# Altium PCB 175-00029 rev4, 486 CCD Interface.PcbDoc (part 2 of 2)
Units mil, origin at the board's own origin, x right, y up, seen from the top; angles counter-clockwise.
Board outline 2440.95 x 2610.24 mil, 4 copper layers (Top Layer (*.GTL), Internal Plane 1 (*.GP1), Mid-Layer 1  (*.G1), Bottom Layer (*.GBL)), stack 62.6 mil thick; 56 components, 48 nets, 263 pads, 206 vias.
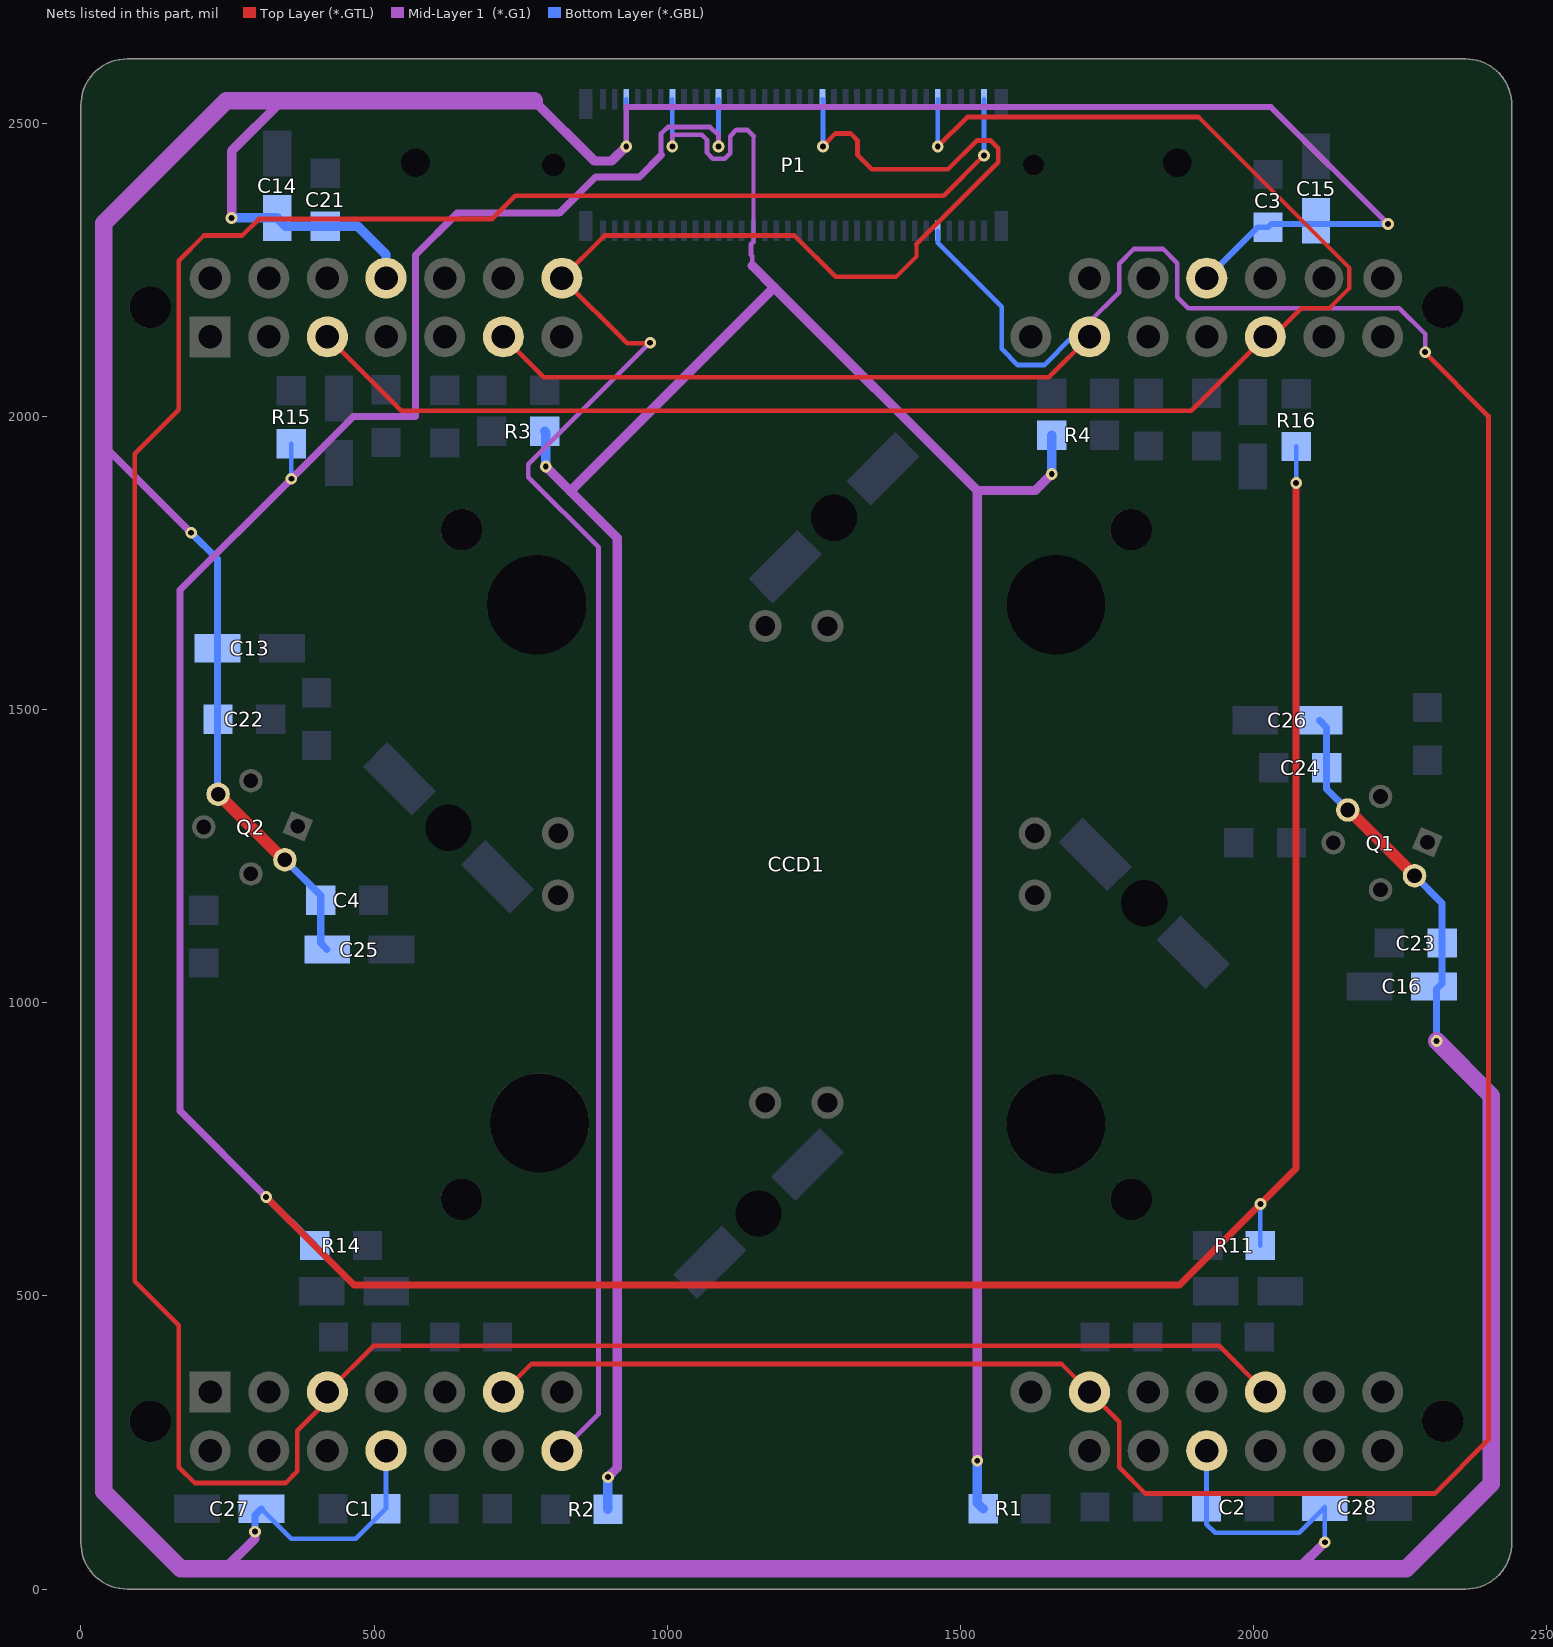
[diagram p4: the nets of this part, all layers, seen from the top]

## Via types
v1: diameter 20, hole 10, Top Layer (*.GTL) to Bottom Layer (*.GBL), 205 vias
v2: diameter 18, hole 8, Top Layer (*.GTL) to Bottom Layer (*.GBL), 1 vias

## Nets (pads, with @x,y where several pads share a name; then routed paths per layer and width w, separated by ;. In a path a pad name is that pad's centre, name@x,y a point inside that pad or via, vN(x,y) a via of type N, cw(c..) or ccw(c..) an arc to the next point about the centre after c; other vN are vias at no path point) (continued)
S3: CCD1.A7 CCD1.D7 P1.29 | length 3622.8
  Top Layer (*.GTL) w7: 1390.43,2238.48 1425.15,2273.21 1425.15,2294.15
  Top Layer (*.GTL) w8: v1@971,2125 931.71,2125 CCD1.D7@820.49,2236.22 893.27,2309 1217,2309 1287.52,2238.48 1390.43,2238.48 ; v1(1266,2461) 1266,2462.16 1286.84,2483 1313,2483 1324.58,2471.42 1324.58,2446.42 1349,2422 1479.09,2422 1528.09,2471 1552,2471 1565,2458 1565,2434 1425.15,2294.15
  Mid-Layer 1  (*.G1) w8: CCD1.A7@820.49,236.22 883,298.73 883,1777 763,1897 763,1918.43 v1@969.57,2125
  Bottom Layer (*.GBL) w8: P1.29@1264.84,2541.34 1266,2540.18 v1(1266,2461)
  other v1: 971,2126
SG: CCD1.B6 CCD1.B16 CCD1.C6 CCD1.C16 P1.10 | length 6063.7
  Top Layer (*.GTL) w8: CCD1.B6@720.49,336.22 768.27,384 1672.71,384 CCD1.B16@1720.49,336.22 1771,285.71 1771,208 1816,163 2309.37,163 2401,254.63 2401,2001 2293,2109 v1(2293,2110) ; CCD1.C6@720.49,2136.22 789.71,2067 1651.27,2067 CCD1.C16@1720.49,2136.22
  Mid-Layer 1  (*.G1) w8: CCD1.C16@1720.49,2136.22 1720.49,2161.49 1771,2212 1771,2261 1796,2286 1846,2286 1870.08,2261.92 1870.08,2203.92 1889,2185 2249,2185 2293,2141 v1(2293,2110)
  Bottom Layer (*.GBL) w8: P1.10@1461.69,2316.93 1461.69,2296.31 1570.55,2187.45 1570.55,2115.45 1598,2088 1643,2088 1691.22,2136.22 CCD1.C16@1720.49,2136.22
TGA: CCD1.B3 CCD1.B19 P1.1 | length 5707.1
  Top Layer (*.GTL) w8: v1(1540.43,2445.43) 1472,2377 741,2377 701,2337 303.02,2337 275.02,2309 210,2309 167,2266 167,2011.92 92,1936.92 92,525 167,450 167,208 194,181 349.09,181 369,200.92 369,270 420.49,321.49 CCD1.B3@420.49,336.22 499.27,415 1941.71,415 CCD1.B19@2020.49,336.22
  Bottom Layer (*.GBL) w8: v1(1540.43,2445.43) P1.1@1540.43,2541.34
TGB: CCD1.C3 CCD1.C19 P1.9 | length 2826.5
  Top Layer (*.GTL) w7: 1906.52,2511 2163.49,2254.03 2163.49,2218.41 2130.08,2185
  Top Layer (*.GTL) w8: CCD1.C3@420.49,2136.22 546.71,2010 1894.27,2010 CCD1.C19@2020.49,2136.22 2033.02,2136.22 2081.8,2185 2130.08,2185 ; v1(1461.69,2461) 1511.69,2511 1906.52,2511
  Bottom Layer (*.GBL) w8: v1(1461.69,2461) P1.9@1461.69,2541.34
VOD: C1.2 C2.2 C3.2 C4.2 C13.1 C14.1 C15.1 C16.1 C21.2 C22.2 C23.2 C24.2 C25.1 C26.1 C27.1 C28.1 CCD1.A4 CCD1.A18 CCD1.D4 CCD1.D18 P1.63 Q1.2 Q1.6 Q2.2 Q2.6 | length 11520.7
  Top Layer (*.GTL) w20: Q2.6@234,1356 Q2.2@346,1244 ; Q1.6@2163,1329 Q1.2@2275,1217
  Mid-Layer 1  (*.G1) w10: v1(930.2,2461) 930.2,2528 2030,2528 v1(2229.5,2328.5)
  Mid-Layer 1  (*.G1) w12: 39,1951 v1(188,1802)
  Mid-Layer 1  (*.G1) w16: 246,35 297,86 v1(297,98) ; v1(257,2339) 257,2453 343,2539 ; 773,2539 876,2436 905.2,2436 v1(930.2,2461) ; 2077,35 v1(2122,80)
  Mid-Layer 1  (*.G1) w30: 773,2539 343,2539 248,2539 39,2330 39,1951 39,166 170,35 246,35 2077,35 2261,35 2406,180 2406,841.63 v1(2312.63,935)
  Bottom Layer (*.GBL) w8: C27.1@308,137 359,86 469,86 C1.2@520,137 ; C1.2@520.49,137.49 CCD1.A4@520.49,236.22 ; v1(930.2,2461) P1.63@930.2,2541.34 ; CCD1.A18@1920,235.73 C2.2@1920,140 1920,111 1935,96 2078,96 C28.1@2122,140 v1(2122,80)
  Bottom Layer (*.GBL) w10: CCD1.D18@1920.49,2236.22 2007.27,2323 C3.2@2025,2323 2030.5,2328.5 v1(2229.5,2328.5)
  Bottom Layer (*.GBL) w12: v1(188,1802) 233,1757 C13.1@233,1605 233,1357 Q2.6@234,1356 ; v1(297,98) 297,126 C27.1@308,137 ; Q2.2@348,1244 409.15,1182.85 C4.2@409.15,1175 409.15,1101.85 C25.1@420,1091 ; C26.1@2113,1482 2125,1470 C24.2@2125,1401 2125,1365 Q1.6@2161,1329 ; Q1.2@2275,1217 2322,1170 C23.2@2322,1102 2322,1032.75 2312.63,1023.37 v1(2312.63,935)
  Bottom Layer (*.GBL) w16: v1(257,2339) C14.1@335,2339 349,2325 C21.2@417,2325 472,2325 520.49,2276.51 CCD1.D4@520.49,2236.22
VOG: P1.55 R1.2 R2.2 R3.2 R4.2 | length 5411
  Mid-Layer 1  (*.G1) w7: 1147.42,2298.12 1147.42,2478.58
  Mid-Layer 1  (*.G1) w8: v1(1008.94,2461) 1008.94,2480.94 1059.06,2480.94 1068,2472 1068,2450 1078,2440 1098.5,2440 1107.5,2449 1107.5,2478.5 1118,2489 1137,2489 1147.42,2478.58 ; 1145.42,2257.58 1145.42,2273.88 1143,2276.3 1143,2293.7 1147.42,2298.12
  Mid-Layer 1  (*.G1) w16: v1(793,1915) 915,1793 915,207 v1(899,191) ; 835,1873 1182.5,2220.5 ; 1145.42,2257.58 1182.5,2220.5 ; v1(1529,219) 1529,1874 ; v1(1656,1902) 1628,1874 1529,1874 ; 1182.5,2220.5 1529,1874
  Bottom Layer (*.GBL) w8: v1(1008.94,2461) P1.55@1008.94,2541.34
  Bottom Layer (*.GBL) w16: R3.2@791,1975 793,1973 v1(793,1915) ; R2.2@899,136 v1@899,191 ; v1(1529,219) 1529,147 R1.2@1539,137 ; v1(1656,1902) R4.2@1656,1968
VRD: P1.47 R11.1 R14.1 R15.1 R16.1 | length 6011
  Top Layer (*.GTL) w12: v1(316,669) 466,519 1874.29,519 v1(2012,656.71) 2073.02,717.73 v1(2073.02,1886.98)
  Mid-Layer 1  (*.G1) w8: 989.5,2446 989.5,2483 ; 990,2483 1001,2494 1073.55,2494 1087.68,2479.87 v1(1087.68,2461)
  Mid-Layer 1  (*.G1) w12: v1(316,669) 169,816 169,1704 v1(359,1894) 465,2000 570.87,2000 570.87,2275.87 642,2347 816.03,2347 878.03,2409 953,2409 990,2446
  Bottom Layer (*.GBL) w8: v1(359,1894) R15.1@359,1954 ; v1(1087.68,2461) P1.47@1087.68,2541.34 ; R11.1@2012,586 v1(2012,656.71) ; v1(2073.02,1886.98) R16.1@2073.02,1949
  Bottom Layer (*.GBL) w12: v1(316,669) R14.1@399,586
pads on no net: P1.0 P1.4 P1.8 P1.32 P1.37 RTD1.0 RTD2.0 RTD3.0 RTD4.0

## Polygon pours and split planes (outlines as drawn)
AGND on Bottom Layer (*.GBL) "BottomGroundPour" (solid, remove dead copper, shelved, pour order 6): 80,2590 2360,2590 2375,2589 2385,2586 2394,2581 2397,2579 2403,2574 2409,2567 2418,2550 2421,2534 2421,67 2419,67 2415,53 2407,41 2393,28.79 2380.94,23 2365,20 80,20 67,21 60,23 49,28 42,33 33,42 24,57 20,74 20,2531 22,2547 28,2561 32,2567 36.58,2572.41 44,2579 56,2586 66,2589 74,2590
AGND on Mid-Layer 1  (*.G1) "Mid1GroundPour" (solid, remove dead copper, shelved, pour order 5): 80,2590 2360,2590 2375,2589 2385,2586 2394,2581 2397,2579 2403,2574 2409,2567 2418,2550 2421,2534 2421,67 2419,67 2415,53 2407,41 2393,28.79 2380.94,23 2365,20 80,20 67,21 60,23 49,28 42,33 33,42 24,57 20,74 20,2531 22,2547 28,2561 32,2567 36.58,2572.41 44,2579 56,2586 66,2589 74,2590
AGND on Top Layer (*.GTL) "TopGroundPour" (solid, remove dead copper, shelved, pour order 4): 80,2590 2360,2590 2375,2589 2385,2586 2394,2581 2397,2579 2403,2574 2409,2567 2418,2550 2421,2534 2421,67 2419,67 2415,53 2407,41 2393,28.79 2380.94,23 2365,20 80,20 67,21 60,23 49,28 42,33 33,42 24,57 20,74 20,2531 22,2547 28,2561 32,2567 36.58,2572.41 44,2579 56,2586 66,2589 74,2590
AGND on Internal Plane 1 (*.GP1) (split plane): 2361.46,2590.14 2373.94,2589.22 2384.75,2585.94 2394.94,2580.49 2403.87,2573.16 2411.2,2564.23 2416.65,2554.05 2420,2542.99 2421.23,2530.51 2420.85,79.48 2419.93,67.01 2416.65,56.19 2411.2,46 2403.87,37.07 2394.94,29.74 2384.76,24.3 2373.7,20.95 2361.22,19.72 79.48,20.1 67.01,21.02 56.19,24.3 46,29.74 37.07,37.07 29.74,46 24.3,56.19 20.94,67.24 19.72,79.73 20.1,2530.75 21.02,2543.23 24.3,2554.05 29.74,2564.23 37.07,2573.16 46,2580.49 56.19,2585.94 67.24,2589.29 79.73,2590.52

## Other copper
Top Layer (*.GTL):
  pour cut-out: 1820.49,336.22 2120.49,336.22 2120.49,236.22 1820.49,236.22 1820,235.73
  pour cut-out: 420.49,236.22 420.49,402.49 448,430 695,430 695,391 672,368 672,236
  pour cut-out: 420.49,2136.22 561,1995.71 561,1990 466.71,1990 320.49,2136.22
  pour cut-out: 2020.49,2136.22 1894.27,2010 1895,2009.27 1895,1971 2026,1971 2027,1970 2170,2113 2170,2136
  pour cut-out: 1724,2239.73 1724,2114 1658,2048 1804,2048 1869,2113 1820.49,2161.51 1820.49,2236.22
  pour cut-out: 1583,2303.06 1583,2270 1669,2184 1671,2184 1671,2186.73 1724,2239.73 1724,2303.06
  pour cut-out: 1382.95,2260 1383,2260.05 1383,2377 1472,2377 1488,2361 1488,2360
  pour cut-out: 1382.95,2529 1382.95,2461 1462,2461 1530,2529
  pour cut-out: 889,2325 771,2325 736,2290 483,2290 469.71,2276.71 469.71,2116.29 558,2028 937,2028 937,2119.71 820.49,2236.22 896.11,2311.84 889,2318.95
  text "*.GTL - TOP LAYER GERBER DATA" at 367,-1421 h80
Mid-Layer 1  (*.G1):
  text "*.G1 - MID LAYER 1 GERBER DATA" at 345,-1699 h80
Bottom Layer (*.GBL):
  pour cut-out: 838.73,2560.01 838.73,2309.86 838.73,2299 849.6,2299 1591.77,2299 1591.77,2558.99
  pour cut-out: 886,2523 886,2472 1546,2472 1546,2523
  pour cut-out: 886,2386 886,2335 1545,2335 1545,2386
  text "175-00029r4" at 1448,317 h35
  text "(C) 2015" at 1447,266 h35
  text "LCOGTN" at 1447,216 h35
  text "*.GBL - BOTTOM LAYER GERBER DATA" at 337,-1873 h80
Internal Plane 1 (*.GP1) (plane layer: these items are gaps in the copper):
  text "*.GP2 - INTERNAL PLANE LAYER 2 GERBER DATA" at 354,-1556 h80

## Silkscreen, mask and mechanical layers (free items; w line width, h text height)
Bottom Overlay:
  lines w1: 886,2335 1545,2335 1545,2386 886,2386 886,2335 ; 886,2472 886,2523 1546,2523 1546,2472 886,2472
Bottom Paste:
  text "*.GBP - BOTTOM-SIDE SOLDER PASTE MASK" at 442.91,-1495.02 h80
Mechanical 1:
  lines w30: 1062.01,1466.54 cw(c1106.3,1466.54) 1106.3,1510.83 1333.66,1510.83 cw(c1333.66,1466.54) 1377.95,1466.54 1377.95,1003.94 cw(c1333.66,1003.94) 1333.66,959.65 1107.28,959.65 ; 1062.99,1466.54 1062.99,1004.92 ccw(c1107.28,1004.92) 1107.28,960.63 ; 0,78.74 ccw(c78.74,78.74) 78.74,0 2362.2,0 ccw(c2362.2,78.74) 2440.95,78.74 2440.94,2531.5 ccw(c2362.2,2531.5) 2362.2,2610.24 78.74,2610.24 ccw(c78.74,2531.5) 0,2531.5 0,78.74
Mechanical 2:
  lines w10: -12869.13,-9564.51 8130.87,-9564.51 8130.87,6435.49 -12869.13,6435.49 -12869.13,-9564.51 ; 4075.87,-9458.51 ccw(c4125.87,-9458.51) 4125.87,-9508.51 4455.87,-9508.51 ccw(c4455.87,-9468.51) 4495.87,-9468.51 4495.87,-9298.51 ccw(c4455.87,-9298.51) 4455.87,-9258.51 4075.87,-9258.51 4075.87,-9458.51 ; 4075.87,-9168.51 ccw(c4125.87,-9168.51) 4125.87,-9218.51 8025.87,-9218.51 ccw(c8025.87,-9168.51) 8075.87,-9168.51 8075.87,-8978.51 ccw(c8025.87,-8978.51) 8025.87,-8928.51 4075.87,-8928.51 4075.87,-9168.51 ; 4075.87,-8838.51 ccw(c4125.87,-8838.51) 4125.87,-8888.51 6005.87,-8888.51 ccw(c6005.87,-8838.51) 6055.87,-8838.51 6055.87,-8688.51 ccw(c6005.87,-8688.51) 6005.87,-8638.51 4075.87,-8638.51 4075.87,-8838.51 ; 4075.87,-8558.51 ccw(c4115.87,-8558.51) 4115.87,-8598.51 4925.87,-8598.51 ccw(c4925.87,-8548.51) 4975.87,-8548.51 4975.87,-8398.51 ccw(c4925.87,-8398.51) 4925.87,-8348.51 4075.87,-8348.51 4075.87,-8558.51 ; 4535.87,-9468.51 ccw(c4575.87,-9468.51) 4575.87,-9508.51 6535.87,-9508.51 ccw(c6535.87,-9468.51) 6575.87,-9468.51 6575.87,-9298.51 ccw(c6535.87,-9298.51) 6535.87,-9258.51 4535.87,-9258.51 4535.87,-9468.51 ; 5015.87,-8548.51 ccw(c5065.87,-8548.51) 5065.87,-8598.51 6005.87,-8598.51 ccw(c6005.87,-8548.51) 6055.87,-8548.51 6055.87,-8398.51 ccw(c6005.87,-8398.51) 6005.87,-8348.51 5015.87,-8348.51 5015.87,-8548.51 ; 6095.87,-8838.51 ccw(c6145.87,-8838.51) 6145.87,-8888.51 8025.87,-8888.51 ccw(c8025.87,-8838.51) 8075.87,-8838.51 8075.87,-8688.51 ccw(c8025.87,-8688.51) 8025.87,-8638.51 6095.87,-8638.51 6095.87,-8838.51 ; 6095.87,-8548.51 ccw(c6145.87,-8548.51) 6145.87,-8598.51 7085.87,-8598.51 ccw(c7085.87,-8548.51) 7135.87,-8548.51 7135.87,-8398.51 ccw(c7085.87,-8398.51) 7085.87,-8348.51 6095.87,-8348.51 6095.87,-8548.51 ; 6615.87,-9458.51 ccw(c6665.87,-9458.51) 6665.87,-9508.51 6995.87,-9508.51 ccw(c6995.87,-9468.51) 7035.87,-9468.51 7035.87,-9298.51 ccw(c6995.87,-9298.51) 6995.87,-9258.51 6615.87,-9258.51 6615.87,-9458.51 ; 7075.87,-9468.51 ccw(c7115.87,-9468.51) 7115.87,-9508.51 8025.87,-9508.51 ccw(c8025.87,-9458.51) 8075.87,-9458.51 8075.87,-9308.51 ccw(c8025.87,-9308.51) 8025.87,-9258.51 7075.87,-9258.51 7075.87,-9468.51 ; 7175.87,-8548.51 ccw(c7225.87,-8548.51) 7225.87,-8598.51 8025.87,-8598.51 ccw(c8025.87,-8548.51) 8075.87,-8548.51 8075.87,-8398.51 ccw(c8025.87,-8398.51) 8025.87,-8348.51 7175.87,-8348.51 7175.87,-8548.51
  lines w19: -12319,-5052.5 -6944,-5052.5 ; -12319,-4709.6 -6944,-4709.6 ; -12379,-7444 ccw(c-12268,-7444) -12268,-7555 -6995,-7555 ccw(c-6995,-7444) -6884,-7444 -6884,-4342 ccw(c-6995,-4342) -6995,-4231 -12268,-4231 ccw(c-12268,-4342) -12379,-4342 -12379,-7444
  lines w20: -12849.06,-8918.64 cw(c-12799.13,-8993.51) -12799.13,-8903.51 -12339.13,-8903.51 cw(c-12339.13,-8993.51) -12249.13,-8993.51 -12249.13,-9043.51 ccw(c-12239.13,-9043.51) -12239.13,-9053.51 -9599.13,-9053.51 cw(c-9599.13,-9143.51) -9509.13,-9143.51 -9509.13,-9483.51 cw(c-9599.13,-9483.51) -9524.25,-9533.45 ; 4032.04,-9548.49 cw(c4125.87,-9458.51) 3995.87,-9458.51 3995.87,-7788.51 cw(c4125.87,-7788.51) 4125.87,-7658.51 8025.87,-7658.51 cw(c8025.87,-7788.51) 8114.53,-7693.44 ; -12849.13,-9483.51 ccw(c-12799.13,-9483.51) -12799.13,-9533.51 -9599.13,-9533.51 ccw(c-9599.13,-9483.51) -9549.13,-9483.51 -9549.13,-9143.51 ccw(c-9599.13,-9143.51) -9599.13,-9093.51 -12239.13,-9093.51 cw(c-12239.13,-9043.51) -12289.13,-9043.51 -12289.13,-8993.51 ccw(c-12339.13,-8993.51) -12339.13,-8943.51 -12799.13,-8943.51 ccw(c-12799.13,-8993.51) -12849.13,-8993.51 -12849.13,-9483.51 ; -5339.13,-9384.51 ccw(c-5209.13,-9384.51) -5209.13,-9514.51 -469.13,-9514.51 ccw(c-469.13,-9384.51) -339.13,-9384.51 -339.13,-7794.51 ccw(c-469.13,-7794.51) -469.13,-7664.51 -5209.13,-7664.51 ccw(c-5209.13,-7794.51) -5339.13,-7794.51 -5339.13,-9384.51 ; 4035.87,-9458.51 ccw(c4125.87,-9458.51) 4125.87,-9548.51 8025.87,-9548.51 ccw(c8025.87,-9458.51) 8115.87,-9458.51 8115.87,-7788.51 ccw(c8025.87,-7788.51) 8025.87,-7698.51 4125.87,-7698.51 ccw(c4125.87,-7788.51) 4035.87,-7788.51 4035.87,-9458.51
  lines w24: -2789.13,-9354.51 -2639.13,-9354.51 ; -2789.13,-9104.51 -2639.13,-9104.51 ; -2789.13,-8854.51 -2639.13,-8854.51 ; -2789.13,-8604.51 -2639.13,-8604.51 ; -2789.13,-8354.51 -2639.13,-8354.51
  lines w30: -13369.13,-10064.51 8630.87,-10064.51 8630.87,6935.49 -13369.13,6935.49 -13369.13,-10064.51
  lines w50: 4220.87,-8199.51 5870.87,-8199.51 ; 4220.87,-7819.51 5870.87,-7819.51 ; 5870.87,-8199.51 4210.87,-8199.51 4210.87,-7819.51 5870.87,-7819.51 ; 5870.87,-8199.51 5870.87,-7819.51
  text "NOTES (UNLESS OTHERWISE SPECIFIED):" at -12549.13,5911.49 h90
  text "GENERAL" at -12449.13,5711.49 h90
  text "1)" at -12349.13,5511.44 h75
  text "PCB IS 4-LAYER, .062\" THICK WITH EQUAL SEPARATION BETWEEN ALL LAYERS" at -12149.13,5511.46 h75
  text "2)" at -12349.13,5361.44 h75
  text "NO SOLDERMASK" at -12149.13,5361.44 h75
  text "3)" at -12349.13,5211.44 h75
  text "ACCEPTABILITY SHALL BE BASED ON IPC-A-600, CLASS 2." at -12149.13,5211.44 h75
  text "4)" at -12349.13,5061.44 h75
  text "THE FOLLOWING GERBER RS274X PHOTO TOOL FILES SHALL BE USED TO DEFINE ALL CIRCUIT FEATURES:" at -12149.13,5061.44 h75
  text "*.GTL - TOP LAYER GERBER DATA" at -11975.13,4871.49 h80
  text "*.GP1- INTERNAL PLANE LAYER 1 GERBER DATA" at -11988,4683 h80
  text "*.G1 - MID LAYER 1 GERBER DATA" at -11973,4478 h80
  text "*.GBL - BOTTOM LAYER GERBER DATA" at -11965,4305 h80
  text "5)" at -12358.82,4095.35 h75
  text "THE PHOTO TOOL SHALL NOT BE COMPENSATED WITHOUT PRIOR ENGINEERING APPROVAL." at -12158.82,4095.35 h75
  text "PCB DESIGNER: JOE TUFTS   PH (805) 880-1639  FAX (805) 961-1792." at -12158.82,3945.4 h75
  text "FABRICATION TOLERANCES" at -12391.13,1353.49 h90
  text "6)" at -12291.13,1153.44 h75
  text "END PRODUCT CONDUCTOR WIDTHS AND PAD DIAMETERS SHALL NOT VARY MORE THAN" at -12091.13,1153.44 h75
  text "0.002\" FROM THE 1:1 DIMENSIONS OF THE MASTER ARTWORK." at -12091.13,1003.49 h75
  text "7)" at -12291.13,853.44 h75
  text "THE CONDUCTIVE PATTERN SHALL BE POSITIONED SO THAT THE LOCATION OF ANY PAD OR" at -12091.13,853.44 h75
  text "LAND SHALL BE WITHIN 0.005\" DIAMETER TO THE TRUE POSITION OF THE HOLE IT CIRCUMSCRIBES." at -12091.13,703.49 h75
  text "8)" at -12291.13,553.44 h75
  text "ALL DRILL HOLE SIZES AND TOLERANCES APPLY AFTER PLATING." at -12091.13,553.44 h75
  text "9)" at -12291.13,403.44 h75
  text "THE MINIMUM ANNULAR RING SHALL BE 0.005\"." at -12091.13,403.44 h75
  text "10)" at -12346.13,253.44 h75
  text "BOW AND TWIST SHALL NOT EXCEED 0.010\" PER INCH." at -12091.13,253.44 h75
  text "11)" at -12336.13,103.44 h75
  text "FOR PCB ROUTING DIMENSIONS: .XXX = +/-.005\"  .XX = +/-.020\"" at -12091.13,103.44 h75
  text "MATERIAL" at -12391.13,-96.51 h90
  text "BASE LAMINATE: POLYIMIDE" at -12091.54,-285.43 h75
  text "12)" at -12346.13,-296.56 h75
  text "SEE STACK-UP LEGEND FOR COPPER CLADDING CALL OUTS" at -12084.13,-442.51 h75
  text "13)" at -12346.13,-446.56 h75
  text "PLATING" at -12391.13,-646.51 h90
  text "14)" at -12346.13,-841.56 h75
  text "ALL HOLES AND CONDUCTIVE SURFACES SHALL BE PLATED WITH A MINIMUM OF 0.001\" COPPER." at -12091.13,-841.56 h75
  text "15)" at -12346.13,-991.56 h75
  text "ALL EXPOSED HOLES AND CONDUCTIVE SURFACES SHALL BE COATED" at -12091.13,-991.56 h75
  text "WITH A GOLD IMMERSION PLATING TO PRESERVE SOLDERABILITY." at -12084.13,-1142.51 h75
  text "COATINGS" at -12391.13,-1341.51 h90
  text "16)" at -12341.13,-1536.56 h75
  text "17)" at -12346.13,-1686.56 h75
  text "MARKING" at -12391.13,-2036.51 h90
  text "18)" at -12346.13,-2231.56 h75
  text "NO INK MARKING IS TO BE USED" at -12096.46,-2250 h75
  text "19)" at -12346.13,-2381.56 h75
  text "ETCHED MARKING IS ACCEPTABLE" at -12106.3,-2407.48 h75
  text "20)" at -12356.13,-2681.56 h75
  text "ELECTRICAL TESTING" at -12391.13,-3031.51 h90
  text "21)" at -12346.13,-3226.56 h75
  text "ALL BOARDS SHALL BE ELECTRICALLY TESTED TO THE SUPPLIED IPC-D-356A NET LIST" at -12091.13,-3226.56 h75
  text "FOR CONTINUITY, OPENS AND SHORTS." at -12091.13,-3376.51 h75
  text "Layer Stack Up Detail for: 175-00029 rev 4, 486 CCD Interface.PcbDoc" at -12319,-4524 h79
  text "Layer" at -12319,-4837.6 h79
  text "Copper Cladding" at -9397,-4930 h120
  text "Name" at -12319,-4995.6 h79
  text "Top Layer (*.GTL)" at -12319,-5253.08 h111
  text "1/2 oz (1 oz. finished)" at -9352,-5284 h100
  text "1 oz" at -9351,-5535 h100
  text "Internal Plane 1 (*.GP1)" at -12318,-5550 h111
  text "Mid-Layer 1  (*.G1)" at -12323,-5811 h111
  text "1 oz" at -9351,-5811 h100
  text "Bottom Layer (*.GBL)" at -12318,-6066 h111
  text "1/2 oz (1 oz. finished)" at -9351,-6076 h100
  text "EQUAL SPACING BETWEEN LAYERS, 0.019 IN NOM." at -12180,-6650 h111
  text "TOTAL BOARD THICKNESS 0.062 IN NOM." at -12224,-6906 h111
  text "Las Cumbres Observatory, Inc." at 6040.87,-7839.51 h90
  text "Las Cumbres Observatory" at 4270.87,-7959.51 h150
  text "PRIMARY PCB SPECIFICATIONS" at -4892.13,-7974.51 h200
  text "6740 Cortona Dr." at 6480.87,-7993.51 h90
  text "Global Telescope Network" at 4430.87,-8119.51 h125
  text "Goleta, CA 93117" at 6430.87,-8143.51 h90
  text "(REFER TO COMPLETE SPEC LISTING AT LEFT FOR FURTHER DETAILS)" at -5239.13,-8179.51 h100
  text "www.lcogt.net" at 6570.87,-8289.51 h90
  text "DATE" at 4095.87,-8400.31 h32
  text "DESIGNED" at 5035.87,-8400.31 h32
  text "DRAWN" at 6115.87,-8400.31 h32
  text "SCALE" at 7195.87,-8400.31 h32
  text "NUMBER OF LAYERS" at -5139.13,-8429.51 h150
  text "4" at -1589.13,-8429.53 h150
  text "Joe Tufts" at 6420.87,-8499.51 h55
  text "Joe Tufts" at 5295.87,-8504.51 h55
  text "1 : 1" at 7480.87,-8518.51 h90
  text "7/16/2013" at 4125.87,-8525.51 h90
  text "FINISHED THICKNESS" at -5139.13,-8679.51 h150
  text ".062\"" at -1764.13,-8679.51 h150
  text "CHECKED/DATE" at 4095.87,-8690.31 h32
  text "APPROVED/DATE" at 6115.87,-8690.31 h32
  text "POLYIMIDE" at -1947.83,-8896.65 h130
  text "BASE MATERIAL" at -5139.13,-8929.51 h150
  text "TITLE" at 4095.87,-8980.31 h32
  text "NOTICE" at -12794.13,-9088.51 h100
  text "175-00029, PCB, 486 CCD Interface" at 4315.87,-9124.51 h100
  text "GOLD IMMERSION" at -2333.13,-9146.51 h150
  text "PLATING TYPE" at -5139.13,-9179.51 h150
  text "THIS DRAWING EMBODIES A PROPRIETARY DESIGN OWNED BY LAS CUMBRES" at -12759.13,-9203.51 h60
  text "OBSERVATORY.  IT IS SUBMITTED FOR A SPECIFIC PURPOSE UNDER A CON-" at -12759.13,-9303.51 h60
  text "SIZE" at 4095.87,-9310.31 h32
  text "DOC NO." at 4555.87,-9310.31 h32
  text "REV" at 6635.87,-9310.31 h32
  text "SHEET" at 7095.87,-9310.31 h32
  text "FIDENTIAL RELATIONSHIP, AND EXCEPT FOR PURPOSES EXPRESSLY GRANTED" at -12759.13,-9398.51 h60
  text "OF" at 7525.87,-9413.51 h60
  text "SOLDER MASK COLOR" at -5139.13,-9429.51 h150
  text "NONE" at -1714.13,-9429.51 h150
  text "1" at 7355.87,-9433.51 h100
  text "X" at 7755.87,-9433.51 h100
  text "4" at 6780.87,-9446.51 h130
  text "-" at 5110.87,-9448.51 h130
  text "GPT" at 5830.6,-9463.31 h130
  text "C" at 4230.87,-9464.51 h100
  text "IN WRITING, ALL RIGHTS ARE RESERVED BY LAS CUMBRES OBSERVATORY." at -12759.13,-9488.51 h60
Mechanical 3:
  text "String" at 1980,2665 h60
  text "String" at 106,2662 h60
  text "String" at 1974,-128 h60
  text "LR" at 179,-132 h60
Mechanical 5:
  text "175-00029 rev5, 486 CCD Interface" at 710.2,-1024.52 h80
  text "LAS CUMBRES OBSERVATORY     7/16/2013" at 710.2,-1174.54 h80
Drill Drawing:
  drawing of 184 lines, arcs and shapes, not listed
  text "Symbol" at -5870,3850 h72
  text "Hit Count" at -5364.12,3850 h72
  text "Finished Hole Size" at -4666.31,3850 h72
  text "Plated" at -3320.71,3850 h72
  text "Hole Type" at -2814.83,3850 h72
  text "1" at -5364.12,3700 h60
  text "8.00mil (0.203mm)" at -4666.31,3700 h60
  text "PTH" at -3320.71,3700 h60
  text "Round" at -2814.83,3700 h60
  text "1" at -5364.12,3550 h60
  text "35.43mil (0.900mm)" at -4666.31,3550 h60
  text "NPTH" at -3320.71,3550 h60
  text "Round" at -2814.83,3550 h60
  text "1" at -5364.12,3400 h60
  text "39.37mil (1.000mm)" at -4666.31,3400 h60
  text "NPTH" at -3320.71,3400 h60
  text "Round" at -2814.83,3400 h60
  text "2" at -5364.12,3250 h60
  text "49.21mil (1.250mm)" at -4666.31,3250 h60
  text "NPTH" at -3320.71,3250 h60
  text "Round" at -2814.83,3250 h60
  text "4" at -5364.12,3100 h60
  text "78.74mil (2.000mm)" at -4666.31,3100 h60
  text "NPTH" at -3320.71,3100 h60
  text "Round" at -2814.83,3100 h60
  text "4" at -5364.12,2950 h60
  text "169.29mil (4.300mm)" at -4666.31,2950 h60
  text "NPTH" at -3320.71,2950 h60
  text "Round" at -2814.83,2950 h60
  text "8" at -5364.12,2800 h60
  text "33.46mil (0.850mm)" at -4666.31,2800 h60
  text "PTH" at -3320.71,2800 h60
  text "Round" at -2814.83,2800 h60
  text "8" at -5364.12,2650 h60
  text "70.87mil (1.800mm)" at -4666.31,2650 h60
  text "NPTH" at -3320.71,2650 h60
  text "Round" at -2814.83,2650 h60
  text "12" at -5364.12,2500 h60
  text "25.00mil (0.635mm)" at -4666.31,2500 h60
  text "PTH" at -3320.71,2500 h60
  text "Round" at -2814.83,2500 h60
  text "54" at -5364.12,2350 h60
  text "40.00mil (1.016mm)" at -4666.31,2350 h60
  text "PTH" at -3320.71,2350 h60
  text "Round" at -2814.83,2350 h60
  text "205" at -5364.12,2200 h60
  text "10.00mil (0.254mm)" at -4666.31,2200 h60
  text "PTH" at -3320.71,2200 h60
  text "Round" at -2814.83,2200 h60
  text "300 Total" at -5364.12,2050 h60
  text ".Legend" at -2395.13,-5447.51 h100
  text "DESIGNED" at 4095.87,-8690.31 h32
  text "DRAWN" at 5645.87,-8690.31 h32
  text "SCALE" at 7195.87,-8690.31 h32
  text "Rich Lobdill" at 4581.87,-8786.51 h55
  text "Rich Lobdill" at 6142.87,-8788.51 h55
  text "1 : 1" at 7480.87,-8808.51 h90
  text "TITLE" at 4095.87,-8980.31 h32
  text "NOTICE" at -12789.13,-9103.51 h100
  text "175-00029, PCB, 486 CCD Interface" at 4312.87,-9124.51 h100
  text "THIS DRAWING EMBODIES A PROPRIETARY DESIGN OWNED BY LAS CUMBRES" at -12754.13,-9218.51 h60
  text "SIZE" at 4095.87,-9310.31 h32
  text "DOC NO." at 4555.87,-9310.31 h32
  text "REV" at 6635.87,-9310.31 h32
  text "SHEET" at 7095.87,-9310.31 h32
  text "OBSERVATORY.  IT IS SUBMITTED FOR A SPECIFIC PURPOSE UNDER A CON-" at -12754.13,-9318.51 h60
  text "FIDENTIAL RELATIONSHIP, AND EXCEPT FOR PURPOSES EXPRESSLY GRANTED" at -12754.13,-9413.51 h60
  text "OF" at 7525.87,-9413.51 h60
  text "2" at 7340.87,-9433.51 h100
  text "X" at 7755.87,-9433.51 h100
  text "-" at 5110.87,-9448.51 h130
  text "3" at 6775.87,-9448.51 h130
  text "C" at 4230.87,-9464.51 h120
  text "GD1" at 5930.87,-9464.51 h120
  text "IN WRITING, ALL RIGHTS ARE RESERVED BY LAS CUMBRES OBSERVATORY." at -12754.13,-9503.51 h60

## Dimensions
2440.94,0 to 1406.5,1511.81 on Mechanical 2
2440.94,0 to 1442.91,960.63 on Mechanical 2
220.49,236.22 to 2220.49,236.22 on Mechanical 2
220.49,236.22 to 220.49,2236.22 on Mechanical 2
0,0 to 2440.94,0 on Mechanical 2
0,0 to 220.49,236.22 on Mechanical 2
0,0 to 220.49,236.22 on Mechanical 2
0,0 to 78.74,2610.24 on Mechanical 2
2417.88,2587.17 to 2577.76,2711.61 on Mechanical 2
0,2531.5 to 1377.95,1466.54 on Mechanical 2
0,2531.5 to 1062.99,1466.54 on Mechanical 2

## Text inside footprints (layer, text, board x,y; h text height)
P1: Bottom Overlay "1" at 1610,2553 h30; Bottom Overlay "2" at 1578,2257 h30
Q1: Bottom Overlay "1" at 2354,1250 h40
Q2: Bottom Overlay "1" at 427,1277 h40